# EAGLE board DRV8835_mini_drive v15 (EAGLE 9.7.0)
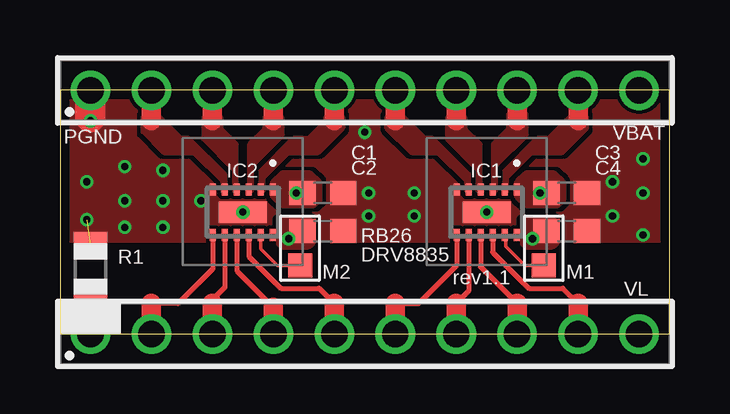
[diagram p0: board, top side]
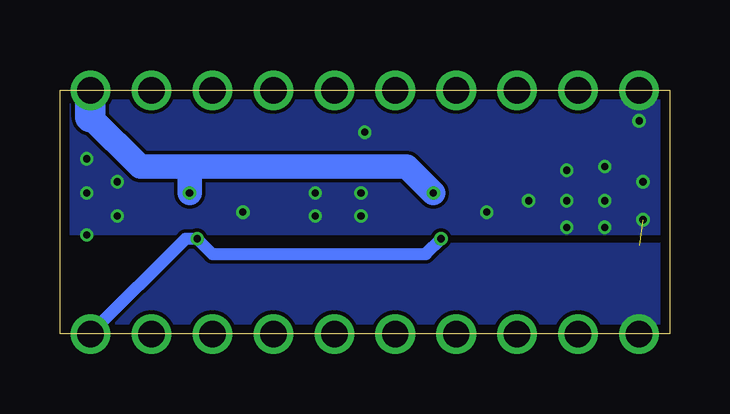
[diagram p1: board, bottom side, seen from below]

Size 25.4 x 10.16 mm. Coordinates in mm from the lower left corner, seen from the top.
Outline: 0,0 25.4,0 25.4,10.16 0,10.16 0,0
Copper layers (1*16): Top 0.035559375mm / dielectric 1.6mm / Bottom 0.035559375mm
Design rules "oshpark-2layer": minimum track width 6mil, minimum drill 10mil, track to track 6mil, track to pad 6mil, pad to pad 6mil, via to via 6mil, smd to smd 6mil, copper to edge 15mil, drill to drill 6mil, minimum pad ring 5mil, minimum via ring 5mil, stop-mask expansion 2.5mil, vias tented up to drill 0mil, thermal gap 10mil

## Footprints (pad centres in the part's own frame; a part is rotated, then mirrored left to right if it is on the bottom)
C0603 = smd 1.1 x 1: 1 -0.85,0; 2 0.85,0
DRV8835DSSR = smd 0.5 x 0.25: 1 -0.95,1.25; 2 -0.95,0.75; 3 -0.95,0.25; 4 -0.95,-0.25; 5 -0.95,-0.75; 6 -0.95,-1.25; 7 0.95,-1.25; 8 0.95,-0.75; 9 0.95,-0.25; 10 0.95,0.25; 11 0.95,0.75; 12 0.95,1.25 | smd 0.9 x 2: 13 0,0
61301011121 = drill 1.1: 1 -11.43,0; 2 -8.89,0; 3 -6.35,0; 4 -3.81,0; 5 -1.27,0; 6 1.27,0; 7 3.81,0; 8 6.35,0; 9 8.89,0; 10 11.43,0
TP10SQ = smd 1 x 1: TP 0,0
R0805 = smd 1.1 x 1.4: 1 -1,0; 2 1,0

## Placement (x,y rotation side)
C1  10uF  [C0603]  10.95,5.87 0 top
C2  1uF  [C0603]  10.95,4.29 0 top
C3  10uF  [C0603]  21.11,5.87 0 top
C4  1uF  [C0603]  21.11,4.29 0 top
IC1  DRV8835DSSR  [DRV8835DSSR]  17.78,5.08 270 top
IC2  DRV8835DSSR  [DRV8835DSSR]  7.62,5.08 270 top
J1  61301011121  [61301011121]  12.7,0 0 top
J2  61301011121  [61301011121]  12.7,10.16 0 top
M1  TPTP10SQ  [TP10SQ]  20.16,2.86 0 top
M2  TPTP10SQ  [TP10SQ]  10,2.86 0 top
R1  0R  [R0805]  1.27,2.7 270 top

## Library data of the parts
C1-C4 R1 = adafruit
IC1 IC2 = DRV8835DSSR; ARROW_PART_NUMBER: DRV8835DSSR; ARROW_PRICE-STOCK: https://www.arrow.com/en/products/drv8835dssr/texas-instruments?region=nac; DESCRIPTION: Motor / Motion / Ignition Controllers & Drivers 1.5A Low Vlt Stepper Motor; HEIGHT: 0.8mm; MANUFACTURER_NAME: Texas Instruments; MANUFACTURER_PART_NUMBER: DRV8835DSSR; MOUSER_PART_NUMBER: 595-DRV8835DSSR; MOUSER_PRICE-STOCK: https://www.mouser.co.uk/ProductDetail/Texas-Instruments/DRV8835DSSR?qs=UFc95S4Z4CYjBOyEmbTDlA%3D%3D
J1 J2 = Wurth_Connectors_WR-PHD; DATASHEET-URL: https://www.we-online.com/catalog/datasheet/61301011121.pdf; GENDER: Pin Header; IR: 3A; MOUNT: THT; PACKAGING: Bag; PART-NUMBER: 61301011121; PINS: 10; PITCH: 2.54mm; ROWS: Single; TYPE: Straight
M1 M2 = testpad

## Nets
DGND: J1.1 R1.2
GND: C1.2 C2.2 C3.2 C4.2 IC1.6 IC1.13 IC2.6 IC2.13 J2.1 R1.1
M1_A_I: IC1.10 J1.9
M1_A_O: IC1.2 J2.9
M1_B_I: IC1.9 J1.8
M1_B_O: IC1.3 J2.8
M2_A_I: IC1.8 J1.7
M2_A_O: IC1.4 J2.7
M2_B_I: IC1.7 J1.6
M2_B_O: IC1.5 J2.6
M3_A_I: IC2.10 J1.5
M3_A_O: IC2.2 J2.5
M3_B_I: IC2.9 J1.4
M3_B_O: IC2.3 J2.4
M4_A_I: IC2.8 J1.3
M4_A_O: IC2.4 J2.3
M4_B_I: IC2.7 J1.2
M4_B_O: IC2.5 J2.2
MODE_SEL_1: IC1.11 M1.TP
MODE_SEL_2: IC2.11 M2.TP
VLOGIC: C2.1 C4.1 IC1.12 IC2.12 J1.10
VMOTOR: C1.1 C3.1 IC1.1 IC2.1 J2.10

## Tracks (layer width: path | path; a pad name or v marks a point on that pad's centre or on a via)
DGND
  Top 0.61: J1.1 R1.2
  pour Bottom (rank 5, no thermals): 0.08,0.08 25.32,0.08 25.32,3.73 0.08,3.73
GND  (via drill 0.3)  (1 unrouted)
  Top 1.27: J2.1 1.27,9.05
  other vias: 7.62,5.08 17.78,5.08 1.27,8.89 24.29,7.3 23.02,4.92 12.86,5.87 23.02,6.35 1.11,4.76 2.7,4.45 1.11,6.35 2.7,5.56 2.7,6.99 4.29,6.83 4.29,5.56 4.29,4.45 5.87,5.56 14.76,5.87 12.86,4.92 14.76,4.92 24.29,4.13 24.29,5.87 12.7,8.41
  pour Bottom (rank 6, no thermals): 0.05,4.18 25.35,4.18 25.35,10.11 0.05,10.11
  pour Top (rank 6, no thermals): 0.05,3.86 25.35,3.86 25.35,10.11 0.05,10.11
M1_A_I
  Top 0.203: IC1.10 18.03,3.4 19.53,1.91 20.95,1.91 21.59,1.27
  Top 0.813: J1.9 21.59,1.27
M1_A_O
  Top 0.813: J2.9 21.59,8.89
  pour Top (rank 2, no thermals): 21.32,9.1 20.38,8.16 20.34,8.15 19.89,8.15 18.52,6.78 18.52,5.98 18.62,5.98 18.62,6.53 18.64,6.57 19.62,7.55 19.66,7.57 20.91,7.57 21.96,8.62 21.96,9 21.86,9.1
M1_B_I
  Top 0.203: IC1.9 17.53,2.79 19.05,1.27
  Top 0.813: J1.8 19.05,1.27
M1_B_O
  Top 0.813: J2.8 19.05,8.89
  pour Top (rank 2, no thermals): 18.68,8.55 18.67,8.51 18.05,7.89 18.05,5.98 18.15,5.98 18.15,7.01 18.16,7.05 19.42,8.3 19.42,9.16 19.32,9.26 18.78,9.26 18.68,9.16
M2_A_I
  Top 0.203: IC1.8 17.03,1.79 16.51,1.27
  Top 0.813: J1.7 16.51,1.27
M2_A_O
  Top 0.813: J2.7 16.51,8.89
  pour Top (rank 2, no thermals): 17.4,6.89 17.41,6.85 17.41,5.98 17.51,5.98 17.51,7.89 16.89,8.51 16.88,8.55 16.88,9 16.78,9.1 16.24,9.1 16.14,9 16.14,8.14
M2_B_I
  Top 0.203: IC1.7 16.53,2.86 14.94,1.27 13.97,1.27
  Top 0.813: J1.6 13.97,1.27
M2_B_O
  Top 0.813: J2.6 13.97,8.89
  pour Top (rank 2, no thermals): 16.92,6.41 16.94,6.37 16.94,5.98 17.04,5.98 17.04,6.62 15.51,8.15 15.22,8.15 15.18,8.16 14.24,9.1 13.7,9.1 13.6,9 13.6,8.62 14.65,7.57 15.74,7.57 15.78,7.55
M3_A_I
  Top 0.203: IC2.10 7.87,3.24 9.21,1.91 10.79,1.91 11.43,1.27
  Top 0.813: J1.5 11.43,1.27
M3_A_O
  Top 0.813: J2.5 11.43,8.89
  pour Top (rank 2, no thermals): 11.05,8.83 10.38,8.16 10.34,8.15 9.73,8.15 8.36,6.78 8.36,5.98 8.46,5.98 8.46,6.53 8.48,6.57 9.46,7.55 9.5,7.57 10.75,7.57 11.8,8.62 11.8,9 11.7,9.1 11.16,9.1 11.06,9 11.06,8.87
M3_B_I
  Top 0.203: IC2.9 7.37,2.63 8.89,1.11
  Top 0.813: J1.4 8.89,1.11
M3_B_O
  Top 0.813: J2.4 8.89,8.89
  pour Top (rank 2, no thermals): 8.52,8.55 8.51,8.51 7.89,7.89 7.89,5.98 7.99,5.98 7.99,7.01 8,7.05 9.26,8.3 9.26,9 9.16,9.1 8.62,9.1 8.52,9
M4_A_I
  Top 0.203: IC2.8 6.87,1.95 6.35,1.43 6.35,1.27
  Top 0.813: J1.3 6.35,1.27
M4_A_O
  Top 0.813: J2.3 6.35,8.89
  pour Top (rank 2, no thermals): 7.24,6.89 7.25,6.85 7.25,5.98 7.35,5.98 7.35,7.89 6.73,8.51 6.72,8.55 6.72,9 6.62,9.1 6.08,9.1 5.98,9 5.98,8.14
M4_B_I
  Top 0.203: IC2.7 6.37,2.72 4.92,1.27 3.81,1.27
  Top 0.813: J1.2 3.81,1.27
M4_B_O
  Top 0.813: J2.2 3.81,8.89
  pour Top (rank 2, no thermals): 6.76,6.41 6.78,6.37 6.78,5.98 6.88,5.98 6.88,6.62 5.35,8.15 5.06,8.15 5.02,8.16 4.08,9.1 3.54,9.1 3.44,9 3.44,8.46 4.33,7.57 5.58,7.57 5.62,7.55
MODE_SEL_1
  Top 0.152: IC1.11 18.57,4.09 18.57,3.65 19.37,2.86 M1.TP
MODE_SEL_2
  Top 0.152: IC2.11 8.37,3.54 9.05,2.86 M2.TP
VLOGIC  (via drill 0.3)
  Bottom 0.508: v9.53,3.97 10.16,3.33 19.05,3.33 v19.68,3.97 20.16,3.97 J1.10
  pour Top (rank 2, no thermals): 9.47,4.13 10.16,4.13 10.16,4.29 9.47,4.29 9.39,4.21
  pour Top (rank 2, no thermals): 19.63,4.13 20.32,4.13 20.32,4.29 19.63,4.29 19.55,4.21
VMOTOR  (via drill 0.3)
  Bottom 1.016: v9.84,5.87 10.95,6.99 20,6.99 | 20,6.99 22.07,6.99 24.13,9.05 | v20,5.87 20,6.99
  Bottom 1.27: 24.13,9.05 J2.10
  pour Top (rank 2, no thermals): 9.31,5.49 10.53,5.49 10.7,5.66 10.7,6.24 10.37,6.57 9.31,6.57 8.99,6.24 8.99,5.82
  pour Top (rank 2, no thermals): 19.47,5.49 20.69,5.49 20.86,5.66 20.86,6.24 20.53,6.57 19.47,6.57 19.15,6.24 19.15,5.82

## Text on the board
tPlace: PGND | VBAT | RB26 | DRV8835 | rev1.1 | VL